# EAGLE board crossfire-30x30 (EAGLE 9.6.2)
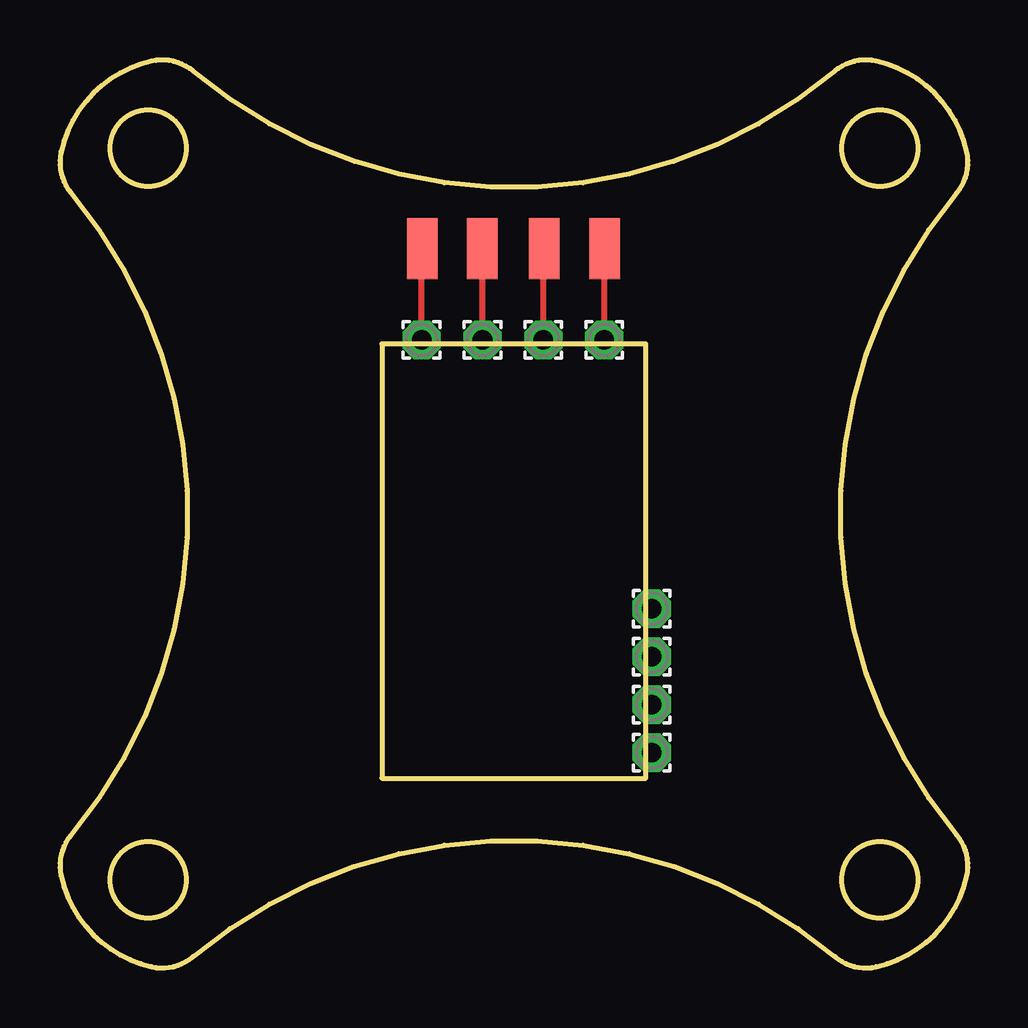
[diagram p0: board, top side]

Size 37.85 x 37.85 mm. Coordinates in mm from the lower left corner, seen from the top.
Outline: 5.54,37.39 arc53 3.82,37.8 arc64 0.05,34.03 arc53 0.46,32.3 arc-80 0.46,5.54 arc53 0.05,3.82 arc64 3.82,0.05 arc53 5.54,0.46 arc-80 32.3,0.46 arc53 34.03,0.05 arc64 37.8,3.82 arc53 37.39,5.54 arc-80 37.39,32.3 arc53 37.8,34.03 arc64 34.03,37.8 arc53 32.3,37.39 arc-80 5.54,37.39
Outline: circle at 3.67,34.17 radius 1.59
Outline: circle at 34.17,34.17 radius 1.59
Outline: circle at 34.17,3.67 radius 1.59
Outline: circle at 3.67,3.67 radius 1.59
Copper layers (1*16): Top 0.035559375mm / dielectric 1.6mm / Bottom 0.035559375mm
Design rules "oshpark-2layer": minimum track width 6mil, minimum drill 10mil, track to track 6mil, track to pad 6mil, pad to pad 6mil, via to via 6mil, smd to smd 6mil, copper to edge 15mil, drill to drill 6mil, minimum pad ring 5mil, minimum via ring 5mil, stop-mask expansion 2.5mil, vias tented up to drill 0mil, thermal gap 10mil
Milling: 4 lines

## Footprints (pad centres in the part's own frame; a part is rotated, then mirrored left to right if it is on the bottom)
1,6/0,8 = drill 0.813 pad 1.6 octagon: 1 0,0
SMD1,27-2,54 = smd 1.27 x 2.54: 1 0,0

## Placement (x,y rotation side)
PAD1  [1,6/0,8]  15.07,26.17 0 top
PAD2  [1,6/0,8]  17.61,26.17 0 top
PAD3  [1,6/0,8]  20.15,26.17 0 top
PAD4  [1,6/0,8]  22.69,26.17 0 top
PAD5  WIREPAD1,6/0,8  [1,6/0,8]  24.67,8.97 0 top
PAD6  WIREPAD1,6/0,8  [1,6/0,8]  24.67,10.97 0 top
PAD7  WIREPAD1,6/0,8  [1,6/0,8]  24.67,12.97 0 top
PAD8  WIREPAD1,6/0,8  [1,6/0,8]  24.67,14.97 0 top
WIRE1  WIREPADSMD1,27-254  [SMD1,27-2,54]  15.1,29.98 0 top
WIRE2  WIREPADSMD1,27-254  [SMD1,27-2,54]  17.59,29.98 0 top
WIRE3  WIREPADSMD1,27-254  [SMD1,27-2,54]  20.18,29.98 0 top
WIRE4  WIREPADSMD1,27-254  [SMD1,27-2,54]  22.7,29.98 0 top

## Library data of the parts
PAD1-PAD8 WIRE1-WIRE4 = wirepad

## Nets
N$1: PAD1.1 WIRE1.1
N$2: PAD2.1 WIRE2.1
N$3: PAD3.1 WIRE3.1
N$4: PAD4.1 WIRE4.1

## Tracks (layer width: path | path; a pad name or v marks a point on that pad's centre or on a via)
N$1
  Top 0.254: PAD1.1 15.07,29.95 WIRE1.1
N$2
  Top 0.254: PAD2.1 17.61,29.96 WIRE2.1
N$3
  Top 0.254: PAD3.1 20.15,29.95 WIRE3.1
N$4
  Top 0.254: PAD4.1 WIRE4.1